# Altium PCB Battery_Operated Node.PcbDoc
Units mm, origin at the board's own origin, x right, y up, seen from the top; angles counter-clockwise.
Board outline 41.22 x 57.73 mm, 2 copper layers (Top, Bottom), stack 1.57 mm thick; 86 components, 66 nets, 272 pads, 54 vias.
Unrouted connection lines stored in the file: 2.
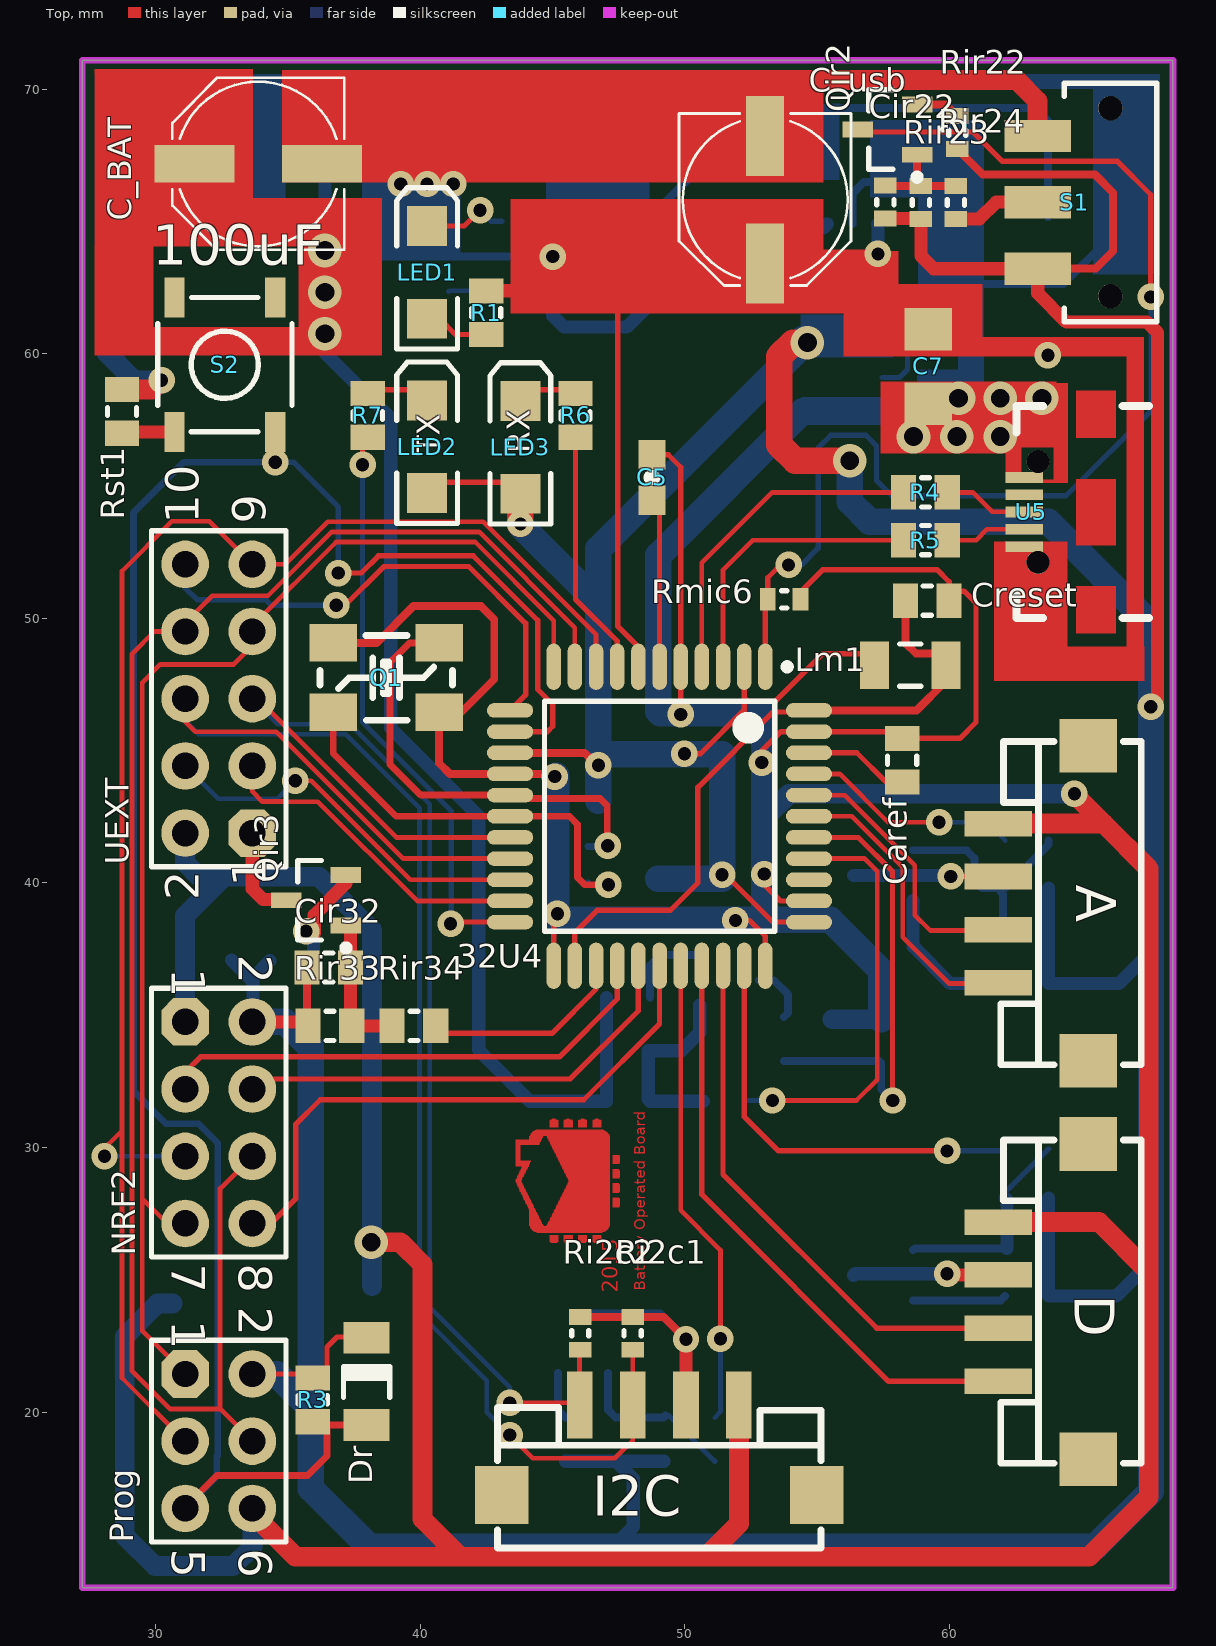
[diagram p0: Top view]
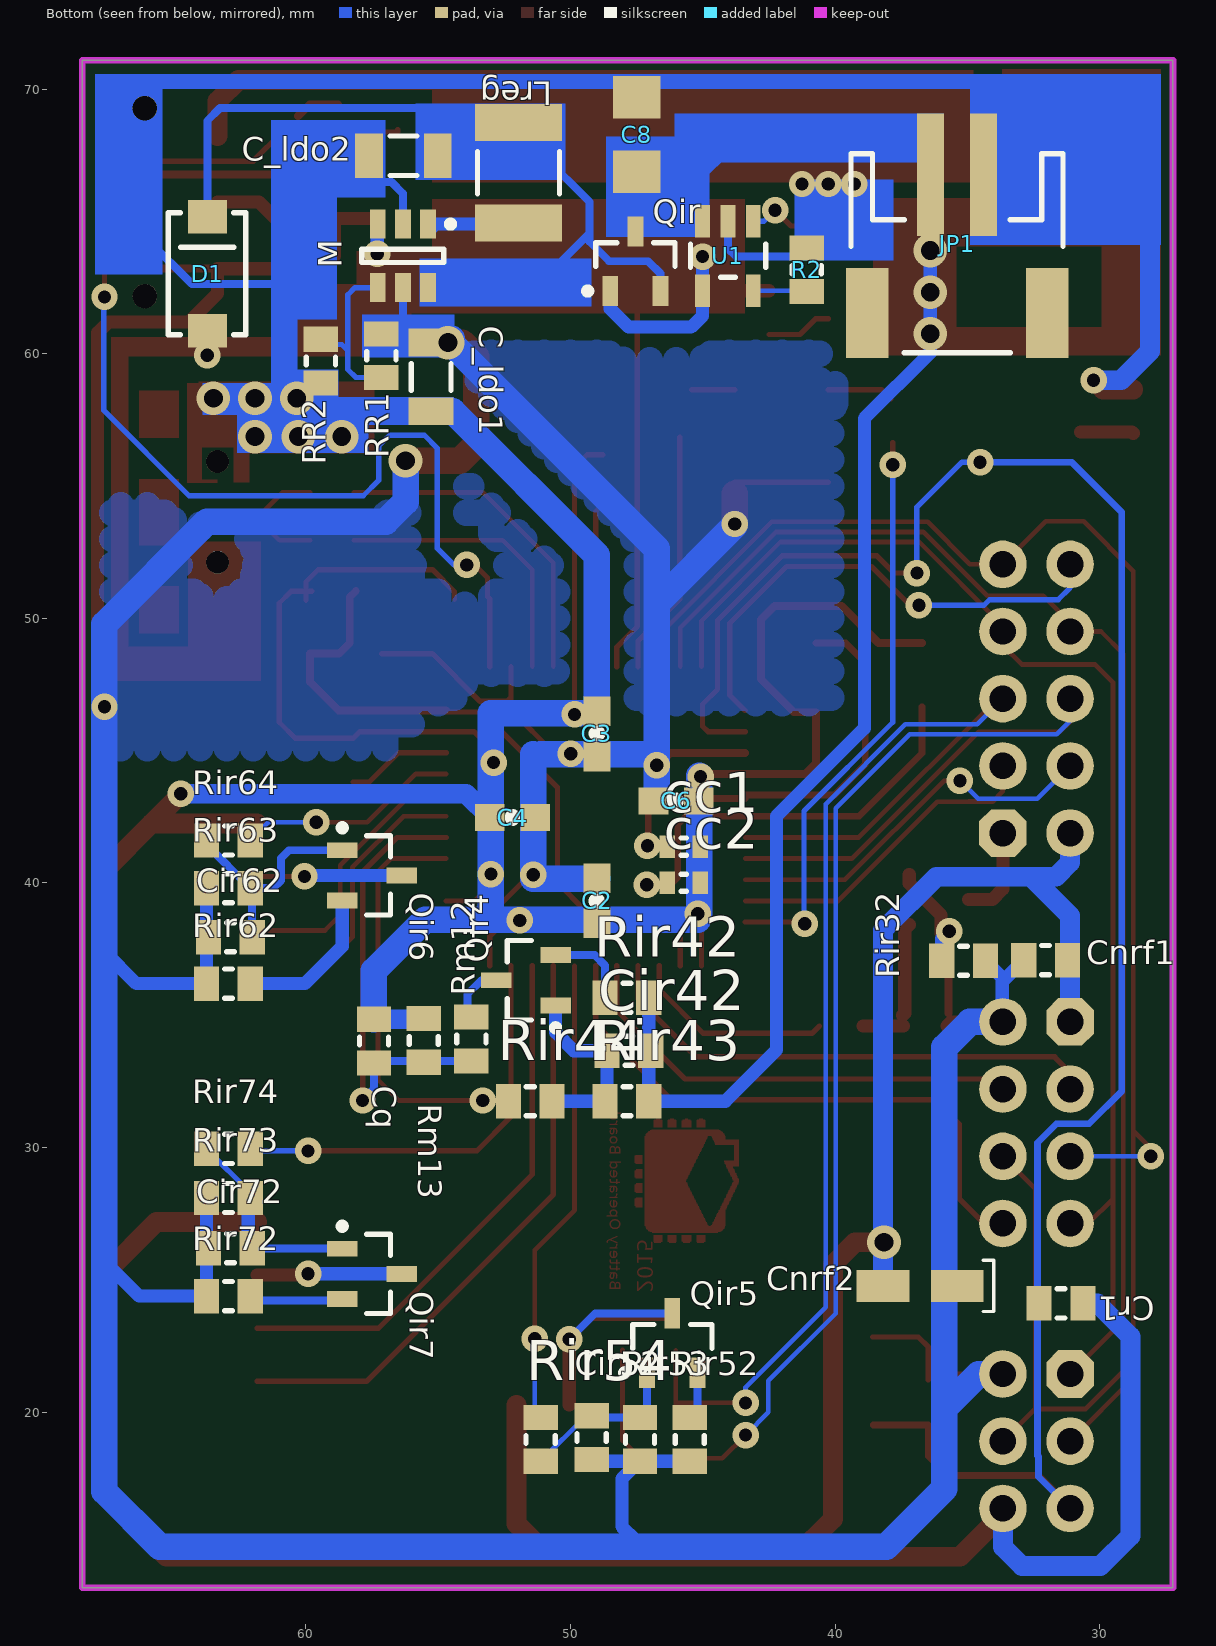
[diagram p1: Bottom view, seen from below]
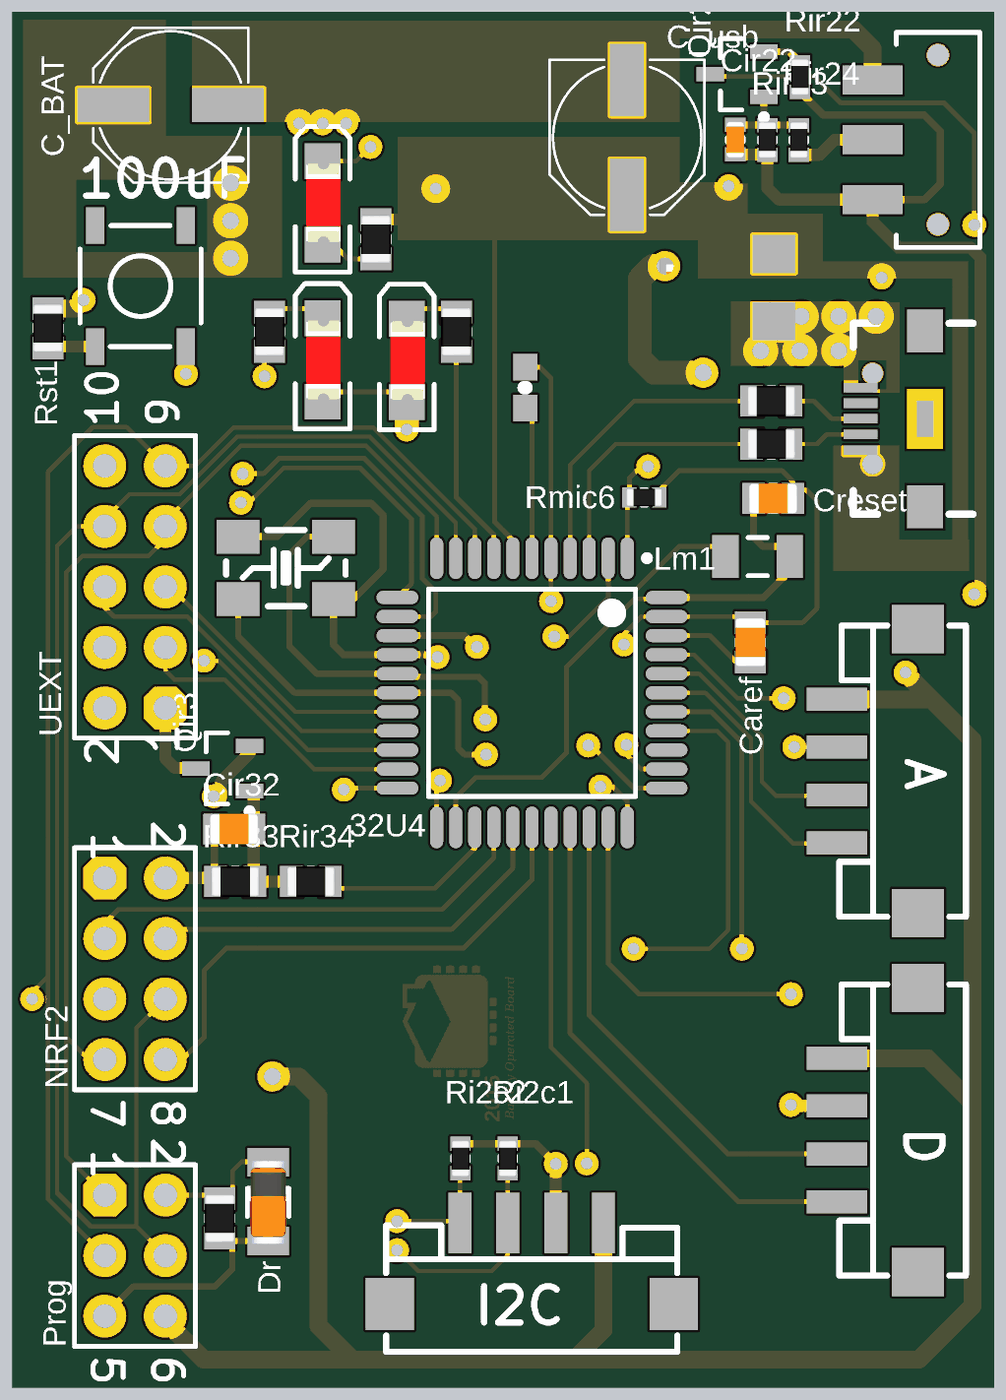
[diagram p2: 3D render of the assembled board from above, using the file's embedded part models]
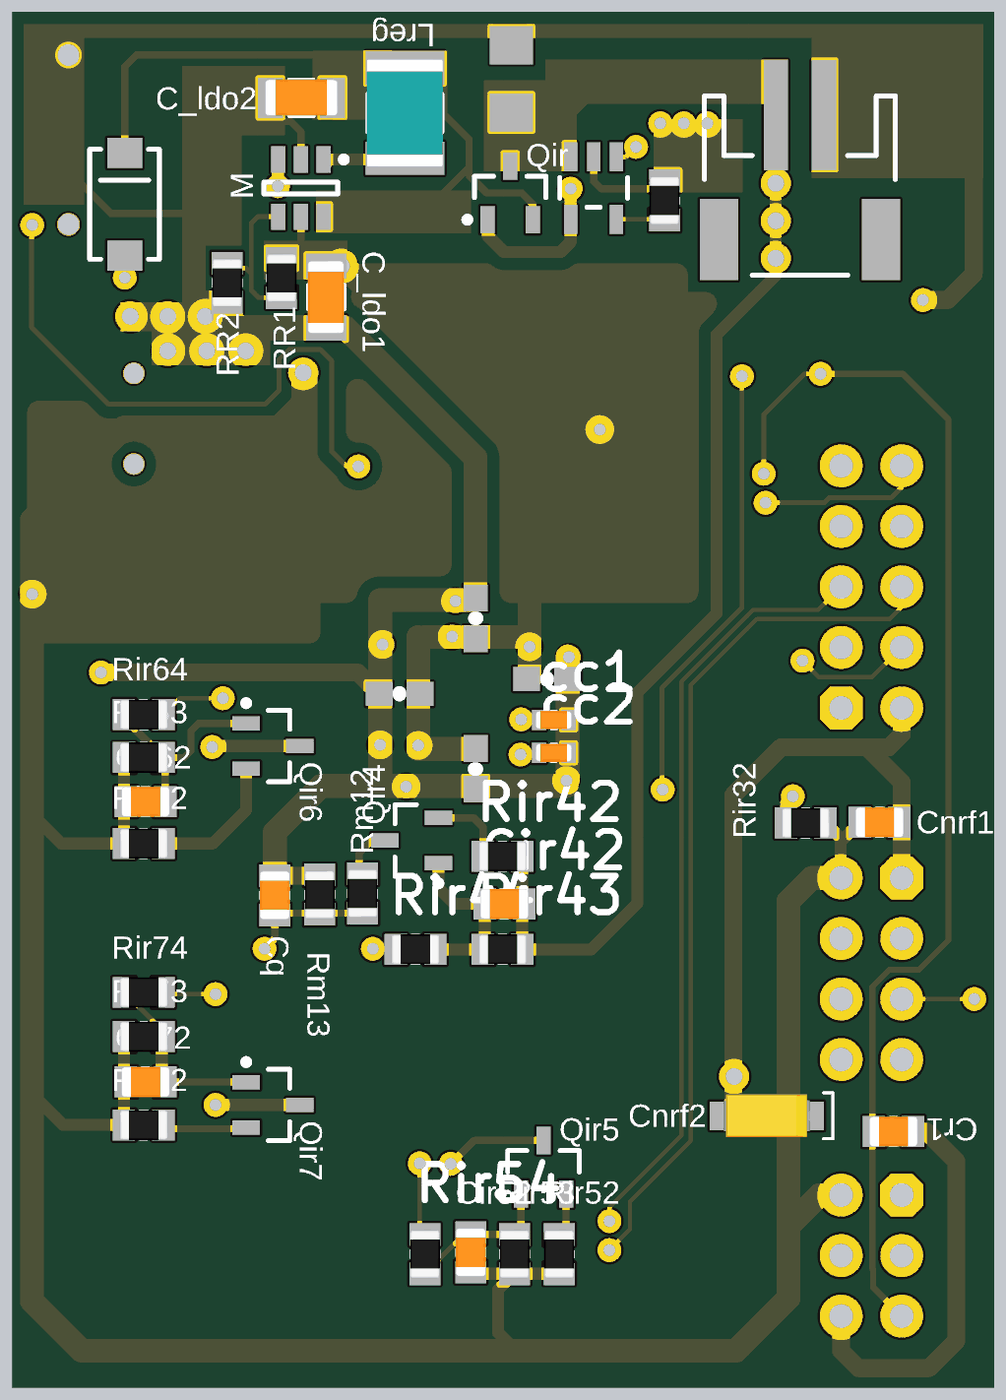
[diagram p3: 3D render of the assembled board from below, using the file's embedded part models]

## Layer stack, top to bottom
Top Solder: solder mask 0.0102, Solder Resist, Dk 3.5
Top: signal copper 0.035
Dielectric 1: core 1.5, FR-4, Dk 4.8
Bottom: signal copper 0.035
Bottom Solder: solder mask 0.0102, Solder Resist, Dk 3.5

## Board outline
27.229,13.36 27.229,71.095 68.453,71.095 68.453,13.36

## Design rules (kind name [scope] priority, off if disabled: settings)
Clearance POLY [InPolygon] p1: gap=0.5
Clearance mdViaVia [IsVia vs IsVia] p2: gap=0.203
Clearance mdPadVia [IsPad vs IsVia] p3: gap=0.203
Clearance mdPadPad [IsPad vs IsPad] p4: gap=0.203
Clearance mdWireVia [(InLayerClass('Signal Layers') AND IsTrack) vs IsVia] p5: gap=0.203
Clearance mdWirePad [(InLayerClass('Signal Layers') AND IsTrack) vs IsPad] p6: gap=0.203
Clearance mdWireWire [(InLayerClass('Signal Layers') AND IsTrack) vs (InLayerClass('Signal Layers') AND IsTrack)] p7: gap=0.203
Clearance [All] p8: gap=0.2
HoleSize [All] p1: absolutevalues=TRUE maxlimit=2540 minlimit=0.381 maxpercent=80.000 minpercent=20.000
HoleToHoleClearance [All] p1: gap=0.203 allowstackedmicrovias=TRUE
PolygonConnect ThermalVias [IsVia] p1: connectstyle=Direct reliefconductorwidth=0.254 reliefentries=4 polygonreliefangle="90 Angle" airgapwidth=0.254
PolygonConnect [All] p2: connectstyle=Relief reliefconductorwidth=0.254 reliefentries=4 polygonreliefangle="90 Angle" airgapwidth=0.254
RoutingVias [All] p1: holewidth=0.5 width=1 viastyle="Through Hole" minholewidth=0.5 minwidth=1 maxholewidth=0.711 maxwidth=1.27
SilkToSilkClearance [All] p1 off: silktosilkclearance=0.254
SilkToSolderMaskClearance [IsPad] p1 off: minsilkscreentomaskgap=0.254 clearancetoexposedcopper=TRUE
SolderMaskExpansion [All] p1: expansion=0.102
Width [All] p1: maxlimit=2540 minlimit=0.178 preferedwidth=0.254
26 further rules are at their usual default settings.

## Components (designator, comment, footprint, x,y, rotation, side; value= is the part's Value field where it differs from the comment)
32U4 "ATmega32U4-AU" 44ML_N 49.047,42.52 r270 top
A "TWIG-4P-2.0-SMD" 4P-SMD-2.0 61.849,39.243 r270 top
C2 ".1uF" 0603-CAP 48.997,39.319 r90 bottom
C3 ".1uF" 0603-CAP 49.004,45.644 r270 bottom
C4 ".1uF" 0603-CAP 52.197,42.469 r180 bottom
C5 "1uF" 0603-CAP 48.768,55.322 r90 top
C6 "4.7uF" 0603-CAP 45.999,43.104 r0 bottom
C7 "4.7uF" 1206 59.207,59.512 r90 top
C8 "4.7uF" 1206 47.498,68.301 r270 bottom
C_BAT "100uF" PANASONIC_D 33.884,67.183 r180 top
C_ldo1 "4.7uF" SMD_CAP_1206 55.27,60.427 r270 bottom
C_ldo2 "4.7uF" SMD_CAP_1206 55.016,67.488 r0 bottom
C_usb "100uF" PANASONIC_D 53.035,65.837 r270 top
Caref "100nF" SMD_CAP_0805 58.217,45.466 r270 top
cc1 "20pF" SMD_CAP_0603 45.72,41.377 r0 bottom
cc2 "20pF" SMD_CAP_0603 45.72,40.005 r0 bottom
Cir22 "1uF 10V" SMD_CAP_0603 57.582,65.735 r90 top
Cir32 "1uF 10V" SMD_CAP_0805 35.716,36.805 r0 top
Cir42 "1uF 10V" SMD_CAP_0805 46.968,33.657 r0 bottom
Cir52 "1uF 10V" SMD_CAP_0805 49.202,18.21 r90 bottom
Cir62 "1uF 10V" SMD_CAP_0805 63.682,37.95 r180 bottom
Cir72 "1uF 10V" SMD_CAP_0805 63.682,26.187 r180 bottom
Cnrf1 "100nF" SMD_CAP_0805 32.868,37.084 r180 bottom
Cnrf2 "4.7uF" "CAPP 1206 (3216X18L) Size A" 35.382,24.765 r0 bottom
Cq "100nF" SMD_CAP_0805 57.429,33.198 r90 bottom
Cr1 "4.7nF" SMD_CAP_0805 32.283,24.105 r180 bottom
Creset "10nF" SMD_CAP_0805 59.995,50.673 r180 top
D "TWIG-4P-2.0-SMD" 4P-SMD-2.0 61.849,24.181 r270 top
D1 "B340A" SMA-DIODE 63.729,63.017 r90 bottom
Dr "1N4148" LL4148 37.973,21.158 r90 top
I2C "TWIG-4P-2.0-SMD" 4P-SMD-2.0 49.047,20.269 r180 top
JP1 "JST-2" JST-2-SMD 35.382,63.068 r0 bottom
LED1 "RED" "LED SMD 1206" 40.259,63.081 r90 top
LED2 "RED" "LED SMD 1206" 40.259,56.49 r90 top
LED3 "RED" "LED SMD 1206" 43.79,56.464 r90 top
Lm1 "Inductor" INDC3216 58.522,48.235 r180 top
Lreg "Inductor(SD3114)" INDC4532 51.968,66.853 r270 bottom
M "mcp1640" MCP1640 56.337,63.703 r270 bottom
NRF2 "Header 4X2" HDR2X4 31.115,34.747 r270 top
Prog "Header 3X2" HDR2X3 31.115,21.438 r270 top
Q1 "16.000MHz/SMD5x3.2/12pF" CRYSTAL_SMD 38.71,47.752 r0 top
Qir "IRLML6401" Micro3_N 47.549,63.5 r90 bottom
Qir2 "IRLML6401" Micro3_N 57.658,68.478 r180 top (schematic designator Qir)
Qir3 "IRLML6401" Micro3_N 36.068,39.345 r180 top (schematic designator Qir)
Qir4 "IRLML6401" Micro3_N 51.689,36.322 r0 bottom (schematic designator Qir)
Qir5 "IRLML6401" Micro3_N 46.152,22.606 r90 bottom (schematic designator Qir)
Qir6 "IRLML6401" Micro3_N 57.506,40.284 r180 bottom (schematic designator Qir)
Qir7 "IRLML6401" Micro3_N 57.506,25.222 r180 bottom (schematic designator Qir)
R1 "330" "RES 0805 (2012X06L)" 42.494,62.381 r270 top
R2 "10k" "RES 0805 (2012X06L)" 41.072,62.357 r90 bottom
R3 "4.7k" "RES 0805 (2012X06L)" 35.941,19.634 r90 top
R4 "22" "RES 0805 (2012X06L)" 59.922,54.762 r180 top
R5 "22" "RES 0805 (2012X06L)" 59.922,52.959 r180 top
R6 "330" "RES 0805 (2012X06L)" 45.872,58.496 r270 top
R7 "330" "RES 0805 (2012X06L)" 38.024,58.496 r270 top
Ri2c1 "4.7K" "RES 0603 (1608X06L)" 48.031,22.352 r90 top
Ri2c2 "4.7K" "RES 0603 (1608X06L)" 46.05,22.352 r90 top
Rir22 "0" "RES 0603 (1608X06L)" 60.3,68.986 r270 top
Rir23 "100K" "RES 0603 (1608X06L)" 58.928,66.345 r270 top
Rir24 "10K" "RES 0603 (1608X06L)" 60.249,65.1 r90 top
Rir32 "0" "RES 0805 (2012X06L)" 35.966,37.059 r180 bottom
Rir33 "100K" "RES 0805 (2012X06L)" 37.414,34.595 r180 top
Rir34 "10K" "RES 0805 (2012X06L)" 40.589,34.595 r180 top
Rir42 "0" "RES 0805 (2012X06L)" 48.692,35.662 r180 bottom
Rir43 "100K" "RES 0805 (2012X06L)" 48.692,31.75 r180 bottom
Rir44 "10K" "RES 0805 (2012X06L)" 52.349,31.75 r180 bottom
Rir52 "0" "RES 0805 (2012X06L)" 45.491,19.787 r270 bottom
Rir53 "100K" "RES 0805 (2012X06L)" 47.371,19.787 r270 bottom
Rir54 "10K" "RES 0805 (2012X06L)" 51.13,19.787 r270 bottom
Rir62 "0" "RES 0805 (2012X06L)" 62.106,36.195 r0 bottom
Rir63 "100K" "RES 0805 (2012X06L)" 62.106,39.802 r0 bottom
Rir64 "10K" "RES 0805 (2012X06L)" 62.106,41.605 r0 bottom
Rir72 "0" "RES 0805 (2012X06L)" 62.106,24.382 r0 bottom
Rir73 "100K" "RES 0805 (2012X06L)" 62.106,28.09 r0 bottom
Rir74 "10K" "RES 0805 (2012X06L)" 62.106,29.944 r0 bottom
Rm12 "1M" "RES 0805 (2012X06L)" 53.746,34.925 r270 bottom
Rm13 "470K" "RES 0805 (2012X06L)" 55.55,33.223 r90 bottom
Rmic6 "4.7K" "RES 0603 (1608X06L)" 53.137,50.721 r0 top
RR1 "976" "RES 0805 (2012X06L)" 57.15,59.106 r90 bottom
RR2 "562" "RES 0805 (2012X06L)" 59.436,58.903 r90 bottom
Rst1 "330" "RES 0805 (2012X06L)" 28.727,58.649 r270 top
S1 "" SWITCH-SPDT-SMD 66.091,65.735 r270 top
S2 "!RESET" TACTILE_SWITCH_SMD 32.614,59.588 r90 top
U1 "MCP73831" SOT23-5 44.044,63.71 r0 bottom
U5 "USB-ABCONN-11794" USB-AB-MICRO-SMD_V03 65.557,54.026 r180 top
UEXT "Header 5X2" HDR2X5 33.655,41.885 r90 top

## Footprints (in the part's own frame and the unit in brackets; to place one, negate y for a bottom-side part, rotate by r counter-clockwise, add the part's x,y. Pads: shape width x height; smd on the part's side, far side on the other; paste and mask are expansions set on the pad)
4P-SMD-2.0 [mil]
  rect 38x100 smd: 1(-118.11,0) 2(-39.37,0) 3(40,0) 4(119,0)
  rect 80x86 smd: SS1(-234.09,134) SS2(235,134)
  silkscreen extent -240,4 241,213
44ML_N [mm] "Thin QFP, 44-Leads, Body 10x10mm, Pitch 0.8mm, IPC Medium Density"
  oval 1.75x0.55 smd: 1(-5.65,4) 2(-5.65,3.2) 3(-5.65,2.4) 4(-5.65,1.6) 5(-5.65,0.8) 6(-5.65,0) 7(-5.65,-0.8) 8(-5.65,-1.6) 9(-5.65,-2.4) 10(-5.65,-3.2) 11(-5.65,-4) 23(5.65,-4) 24(5.65,-3.2) 25(5.65,-2.4) 26(5.65,-1.6) 27(5.65,-0.8) 28(5.65,0) 29(5.65,0.8) 30(5.65,1.6) 31(5.65,2.4) 32(5.65,3.2) 33(5.65,4)
  oval 0.55x1.75 smd: 12(-4,-5.65) 13(-3.2,-5.65) 14(-2.4,-5.65) 15(-1.6,-5.65) 16(-0.8,-5.65) 17(0,-5.65) 18(0.8,-5.65) 19(1.6,-5.65) 20(2.4,-5.65) 21(3.2,-5.65) 22(4,-5.65) 34(4,5.65) 35(3.2,5.65) 36(2.4,5.65) 37(1.6,5.65) 38(0.8,5.65) 39(0,5.65) 40(-0.8,5.65) 41(-1.6,5.65) 42(-2.4,5.65) 43(-3.2,5.65) 44(-4,5.65)
  silkscreen extent -5.77,-4.35 4.35,4.95, body extent -5,-5 5,5, height 1.2
0603-CAP [mil] "0603-CAP"
  rect 44x40 smd: 1(-33.46,0) 2(34,0)
  silkscreen extent 0,-1 0,2
1206 [mil] "1206"
  rect 63x71 smd: 1(-55.12,0) 2(56,0)
"CAPP 1206 (3216X18L) Size A" [mm] "Chip Capacitor, 2-Leads, Body 3.2x1.6mm, IPC High Density, chip Tantalum"
  rect 1.999x1.199 smd: 1(0,0) 2(2.8,0)
  silkscreen extent -1.38,-0.97 -0.99,0.97, body extent -0.43,-0.9 3.21,0.9, height 1.8
CRYSTAL_SMD [mil] "CRYSTAL_SMD"
  rect 71x56 smd: 1(-78.74,-51.18) 2(79,52) NC_1(79,-51.18) NC_2(-78.74,52)
  silkscreen extent -98,-63 99,63
HDR2X3 [mm]
  oct 1.8x1.8 hole 1: 1(0,0)
  round 1.8 hole 1: 2(0,2.54) 3(2.54,0) 4(2.54,2.54) 5(5.08,0) 6(5.08,2.54)
  silkscreen extent -1.27,-1.27 6.35,3.81
HDR2X4 [mm]
  oct 1.8x1.8 hole 1: 1(0,0)
  round 1.8 hole 1: 2(0,2.54) 3(2.54,0) 4(2.54,2.54) 5(5.08,0) 6(5.08,2.54) 7(7.62,0) 8(7.62,2.54)
  silkscreen extent -1.27,-1.27 8.89,3.81
HDR2X5 [mm]
  oct 1.8x1.8 hole 1: 1(0,0)
  round 1.8 hole 1: 2(0,2.54) 3(2.54,0) 4(2.54,2.54) 5(5.08,0) 6(5.08,2.54) 7(7.62,0) 8(7.62,2.54) 9(10.16,0) 10(10.16,2.54)
  silkscreen extent -1.27,-1.27 11.43,3.81
INDC3216 [mm] "Chip Inductor, Body 3.2x1.6mm, IPC High Density"
  rect 1.1x1.8 smd: 1(-1.35,0) 2(1.35,0)
  silkscreen extent -0.4,-0.8 0.4,0.8
INDC4532 [mm] "Chip Inductor, Body 4.5x3.2mm, IPC High Density"
  rect 1.4x3.3 smd: 1(-1.9,0) 2(1.9,0)
  silkscreen extent -0.8,-1.55 0.8,1.55, body extent -2.25,-1.6 2.25,1.6, height 1.75
JST-2-SMD [mil] "JST-2-SMD"
  rect 40x182 smd: 1(-39.37,-145.67) 2(40,-145.67)
  rect 63x134 smd: NC1(-133.86,60) NC2(134,60)
  silkscreen extent -157,-177 158,119
"LED SMD 1206" [mm]
  rect 1.5x1.5 smd: 1(-1.75,0) 2(1.75,0)
  silkscreen extent -2.9,-1.15 3.2,1.15, body extent -1.65,-0.76 1.65,0.69, height 1.36
LL4148 [mm] "MELF Diode, 2-Leads, Body 3.5x1.4mm, IPC Medium Density"
  rect 1.2x1.75 smd: 1(-1.65,0) 2(1.65,0)
  silkscreen extent -0.61,-0.88 0.57,0.88, body extent -1.78,-0.75 1.72,0.75, height 1.55
MCP1640 [mm] "SOT23, 6-Leads, Body 2.90x2.70mm, Pitch 0.95mm, IPC Medium Density"
  rect 1.1x0.6 smd: 1(-1.2,0.95) 2(-1.2,0) 3(-1.2,-0.95) 4(1.2,-0.95) 5(1.2,0) 6(1.2,0.95)
  silkscreen extent -1.32,-1.55 0.25,1.92, body extent -0.9,-1.55 0.9,1.55, height 0.9
Micro3_N [mm] "SOT23, 3-Leads, Body 2.9x1.3mm, Pitch 0.95mm, Lead Span 2.3mm, IPC Medium Density"
  rect 1.15x0.6 smd: 1(-1.125,0.95) 2(-1.125,-0.95) 3(1.125,0)
  silkscreen extent -1.25,-1.5 0.7,1.93, body extent -0.7,-1.5 0.7,1.5, height 1.12
PANASONIC_D [mil]
  rect 119x56 smd: +(95,0) -(-94.49,0)
  silkscreen extent -128,-128 128,128
"RES 0603 (1608X06L)" [mm] "Chip Resistor, 2-Leads, Body 1.6x0.8mm, IPC High Density _ (0.063W)"
  rect 0.6x0.85 smd: 1(0,0) 2(1.244,0)
  silkscreen extent 0.52,-0.33 0.72,0.33, body extent -0.14,-0.38 1.38,0.38, height 0.45
"RES 0805 (2012X06L)" [mm] "Chip Resistor, 2-Leads, Body 2.0x1.3mm, IPC High Density _ (0.100 W)"
  rect 0.95x1.3 smd: 1(0,0) 2(1.65,0)
  silkscreen extent 0.67,-0.55 0.97,0.55, body extent -0.19,-0.63 1.84,0.64, height 0.6
SMA-DIODE [mil] "SMA-DIODE"
  rect 50x58 smd: A(-84.65,0) C(85,0)
  silkscreen extent -91,-57 91,58
SMD_CAP_0603 [mm]
  rect 0.6x0.85 smd: 1(-0.622,0) 2(0.622,0)
  silkscreen extent -0.1,-0.33 0.1,0.33, body extent -0.76,-0.38 0.76,0.38, height 0.6
SMD_CAP_0805 [mm]
  rect 0.95x1.3 smd: 1(0,0) 2(1.65,0)
  silkscreen extent 0.67,-0.55 0.97,0.55, body extent -0.19,-0.63 1.84,0.63, height 0.65
SMD_CAP_1206 [mm]
  rect 1.05x1.7 smd: 1(0,0) 2(2.596,0)
  silkscreen extent 0.8,-0.75 1.8,0.75, body extent -0.22,-0.77 2.82,0.75, height 0.75
SOT23-5 [mil] "SOT23-5"
  rect 22x48 smd: 1(-37.4,-51.18) 2(0,-51.18) 3(38,-51.18) 4(38,52) 5(-37.4,52)
  silkscreen extent -56,-17 56,32
SWITCH-SPDT-SMD [mil]
  round 36 hole 36: 1(-139.76,0) 1(140,0)
  rect 48x99 smd: 1(-98.43,-108.27) 2(0,-108.27) 3(99,-108.27)
  silkscreen extent -177,-69 178,69
TACTILE_SWITCH_SMD [mil] "TACTILE_SWITCH_SMD"
  rect 60x30 smd: 1(-100,75) 2(100,75) 3(-100,-75) 4(100,-75)
  silkscreen extent -100,-100 100,100
USB-AB-MICRO-SMD_V03 [mil] "USB-AB-MICRO-SMD_V03"
  round 34 hole 34: 1(87,75) 1(87,-74.8)
  rect 56x16 smd: D+1(107,0) D-1(107,26) GND1(107,-51.18) ID1(107,-25.59) VBUS1(107,52)
  Top region: -29.53,110 30,110 30,181 -29.53,181
  Top region: -29.49,-49.21 30.04,-49.21 30.04,50 -29.49,50
  Top region: -29.53,-180.47 30,-180.47 30,-109.61 -29.53,-109.61
  silkscreen extent -79,-157 119,158

## Part data
32U4: "8-bit AVR Microcontroller, 2.7-5.5V, 32KB Flash, 2.5KB EEPROM, 1KB SRAM, USB Controller, 44-pin TQFP, Industrial Grade (-40°C to 85°C)"
A D I2C: library part TWIG-4P-2.0-SMD-FEMALE-REINFORCE'DD'
C2 C3 C4 C5 C6: library part CAP0603-CAP, "ceramic capacitor"
C7 C8: library part CAP1206, "ceramic capacitor"
C_BAT C_usb: library part CAP_POLD, "Polar Capacitor 6.3V"
C_ldo1 C_ldo2 Caref cc1 cc2 Cir22 Cir32 Cir42 Cir52 Cir62 Cir72 Cnrf1 Cq Cr1 Creset: library part Cap-Bipolar, "ceramic capacitor"
Cnrf2: library part Cap-Polar, "Polar Capacitor"
D1: library part DIODE-SCHOTTKY-B340A, "Schottky diodes in SFE's production catalog<p> /  / BAT20J 1A 23V 0.62Vf<br> / RB751 120mA 40V 0.37Vf<br> / PMEG4005EJ 0.5A 40V 0.42Vf<br> / MBRA140 1A 40V 0.5Vf<br> / B340A  3A 40V SMA <br>"
Dr: library part "Diode 1N4148", "High Conductance Fast Diode"
JP1: library part M02-JST-2MM-SMT, "Standard 2-pin 0.1\" header. Use with <br> / - straight break away headers ( PRT-00116)<br> / - right angle break away headers (PRT-00553)<br> / - swiss pins (PRT-00743)<br> / - machine pins (PRT-00117)<br> / - female headers (PRT-00115)<br><br> /  /  Molex polarized connector foot print use with: PRT-08233 with associated crimp pins and housings.<br><br> /  / 2.54_SCREWTERM for use with  PRT-10571.<br><br> /  / 3.5mm Screw Terminal footprints for  PRT-08084<br><br> /  / 5mm Screw Terminal footprints for use with PRT-08433"
LED1 LED2 LED3: library part LED, "LED"
Lreg: library part Inductor, "Inductor SD3114"
M: "MCP1640DT-I/CHY , 0.65V, Sync Reg., 6LD SOT-23 pkg"
NRF2: "Header, 4-Pin, Dual row"
Prog: "Header, 3-Pin, Dual row"
Q1: library part SMALL_SMD_CRYSTAL
Qir Qir2 Qir3 Qir4 Qir5 Qir6 Qir7: "HEXFET Power MOSFET"
R1 R2 R3 R4 R5 R6 R7 Ri2c1 Ri2c2 Rir22 Rir23 Rir24 Rir32 Rir33 Rir34 Rir42 Rir43 Rir44 Rir52 Rir53 Rir54 Rir62 Rir63 Rir64 Rir72 Rir73 Rir74 Rm12 Rm13 Rmic6 RR1 RR2 Rst1: library part Resistor, "Resistor"
S1: library part SWITCH-SPDTSMD2
S2: library part SWITCH-MOMENTARY-2SMD, "Various NO switches- pushbuttons, reed, etc"
U1: "Miniature single cell, fully integrated Li-Ion, Li-polymer charge management controller<br> / http://ww1.microchip.com/downloads/en/DeviceDoc/21984a.pdf<br> / IC-09995"
U5: "This is a USB AB connector that is compatible with USB OTG. i.e. this connector can serve as a host or device"
UEXT: "Header, 5-Pin, Dual row"

## Via types
v1: diameter 1, hole 0.5, Top to Bottom, 42 vias
v2: diameter 1.27, hole 0.711, Top to Bottom, 12 vias

## Nets (pads, with @x,y where several pads share a name; then routed paths per layer and width w, separated by ;. In a path a pad name is that pad's centre, name@x,y a point inside that pad or via, vN(x,y) a via of type N, cw(c..) or ccw(c..) an arc to the next point about the centre after c; other vN are vias at no path point)
3.3V: 32U4.2 32U4.14 32U4.34 C2.2 C3.2 C4.2 C6.2 C_ldo1.1 Cir22.1 Cir32.1 Cir52.1 Cir62.1 Cir72.1 Cnrf1.1 Cnrf2.1 Dr.2 LED2.1 LED3.1 Lm1.2 M.5 NRF2.2 Prog.2 R3.2 Rir22.2 Rir23.2 Rir32.2 Rir33.2 Rir52.2 Rir53.2 Rir62.2 Rir63.2 Rir72.2 Rir73.2 RR1.2 S1.3 | length 253.2
  Top w0.2: Prog.2 36.258,21.438 36.474,21.221 36.474,22.454 36.854,22.834 Dr.2@38.583,22.834 ; LED2.1@40.259,55.146 LED3.1@43.79,55.146 ; v1(49.987,44.882) 50.597,44.882 52.247,46.532 52.247,47.016 ; v1(51.41,40.31) 51.537,40.31 53.327,38.52 32U4.34 ; 32U4.2 52.247,47.016 ; Lm1.2@57.146,48.666 55.22,48.666 53.416,46.863 52.4,46.863 52.247,47.016
  Top w0.3: Rir33.2@35.716,35.075 Cir32.1 ; 32U4.14 46.216,44.92 46.736,44.399 v1(46.736,44.45) ; Rir22.2 61.265,66.777 65.507,66.777 66.192,66.091 66.192,63.881 65.532,63.221 S1.3
  Top w0.5: NRF2.2 35.612,34.747 Rir33.2 ; Cir22.1 Rir23.2@58.915,65.113 ; Rir23.2 58.928,63.703 59.411,63.221 S1.3 63.341,62.288 64.428,61.201 67.476,61.201 67.876,60.8 67.876,46.921 v1(67.615,46.66)
  Top w1: v1(43.79,53.569) LED3.1 ; v2(54.635,60.427) 54.102,60.427 53.569,59.893 53.569,56.566 54.178,55.956 v2(56.236,55.956)
  Bottom w0.3: M.5 56.337,60.935 56.629,60.642 56.922,60.35 RR1.2@57.455,60.35
  Bottom w0.5: Cnrf1.1 33.68,36.271 ; NRF2.2 33.68,34.773 33.68,36.271 ; Rir32.2 33.68,36.423 33.68,36.271 ; Rir52.2 Rir53.2@47.396,18.137 ; 47.561,15.176 48.057,15.672 48.057,17.476 Rir53.2@47.396,18.137 ; Cir52.1@49.203,18.137 Rir53.2@47.396,18.137 ; C_ldo1.1 55.347,60.35 RR1.2@56.922,60.35 ; Rir73.2 Rir72.2 66.303,24.382 67.626,25.705 ; Rir63.2 Rir62.2 66.407,36.195 67.626,37.414
  Bottom w1: Prog.2 34.569,21.438 35.839,20.168 ; NRF2.2 34.9,34.747 35.865,33.782 35.865,17.103 38.058,14.91 65.532,14.91 67.626,17.004 67.626,25.705 67.626,37.414 67.626,49.773 63.741,53.657 56.985,53.657 56.236,54.407 v2(56.236,55.956) ; v1(43.79,53.569) 43.815,53.543 43.815,53.492 46.736,50.571 ; C6.2@46.736,43.104 v1(46.736,44.45) v1@46.736,44.856 ; C2.2@48.997,40.157 51.41,40.157 v1(51.41,40.31) 51.41,44.856 ; 51.13,44.856 v1@46.736,44.856 ; C_ldo1.1@54.483,60.579 54.483,60.376 46.736,52.629 46.736,50.571 ; v2(54.635,60.427) C_ldo1.1 ; C_ldo1.1@55.27,60.642 RR1.2@56.629,60.642 ; v1@46.736,44.856 46.736,50.571
5V: 32U4.7 C7.2 C_usb.+ D1.A M.3 Qir.1 R1.1 U1.4 U5.VBUS1 | length 50
  Top w0.2: 45.745,63.703 47.473,61.976 47.473,49.69 48.247,48.915 32U4.7
  Top w0.5: R1.1 44.093,62.381 44.171,62.459 ; v1(45.009,63.678) 45.009,63.703 45.745,63.703 v1@57.302,63.703 ; C7.2@58.318,60.554 58.725,60.147 66.904,60.147 67.081,59.969 ; 64.186,47.904 66.523,47.904 ; 66.954,59.512 67.005,59.461
  Bottom w0.5: v1(45.009,63.678) U1.4 45.009,61.443 45.441,61.011 47.803,61.011 48.499,61.707 Qir.1 ; M.3 57.302,64.888 v1(57.302,63.779)
  other v1: 63.729,59.944
A0: 32U4.36
A1: 32U4.37 Rir44.1 | length 15.9
  Top w0.178: v1(53.315,31.775) 56.49,31.775 57.277,32.563 57.277,40.445 56.803,40.92 32U4.37
  Bottom w0.178: Rir44.1@52.375,31.775 v1(53.315,31.775)
A2: 32U4.38 Cq.1 Rm12.2 Rm13.1 | length 17.5
  Top w0.2: 32U4.38 56.557,41.72 57.85,40.427 v1@57.85,31.775
  Bottom w0.3: Rm12.2 Cq.1@57.352,33.275 ; Cq.1 57.429,32.207 v1(57.861,31.775)
A3: 32U4.39 A.4 | length 11.3
  Top w0.178: 32U4.39 56.312,42.52 58.242,40.589 58.242,37.948 59.995,36.195 A.4@61.824,36.195
A4: 32U4.40 A.3 | length 10.4
  Top w0.178: 32U4.40 56.051,43.32 58.699,40.671 58.699,38.786 59.284,38.202 A.3@61.824,38.202
A5: 32U4.41 Rir64.1 | length 8.4
  Top w0.178: 32U4.41 55.855,44.12 57.683,42.291 v1(59.614,42.291)
  Bottom w0.178: v1(59.614,42.291) 61.42,42.291 Rir64.1
CE1NRF: 32U4.26 NRF2.3 | length 19.4
  Top w0.2: NRF2.3 31.115,32.842 31.699,33.426 45.263,33.426 47.447,35.611 32U4.26
CSN1NRF: 32U4.27 NRF2.4 | length 17.5
  Top w0.2: NRF2.4 34.036,32.588 45.669,32.588 48.247,35.166 32U4.27
D0: 32U4.20 UEXT.4 | length 14.6
  Top w0.178: v1(35.281,43.866) 35.879,43.866 39.626,40.12 32U4.20
  Bottom w0.178: UEXT.4 32.36,43.18 34.595,43.18 v1(35.281,43.866)
D1: 32U4.21 UEXT.3 | length 12.4
  Top w0.178: UEXT.3 33.655,43.459 34.038,43.077 34.95,43.077 34.953,43.074 36.133,43.074 39.887,39.32 32U4.21
D2: 32U4.19 I2C.3 Ri2c1.1 UEXT.6 | length 60.2
  Top w0.178: UEXT.6 31.115,46.101 31.496,45.72 34.564,45.72 39.364,40.92 32U4.19 ; v1(43.383,19.126) 44.259,18.25 47.358,18.25 48.031,18.923 I2C.3 Ri2c1.1
  Bottom w0.178: UEXT.6 31.115,46.126 31.623,45.618 37.18,45.618 39.975,42.824 39.975,23.724 42.52,21.179 42.52,19.99 v1(43.383,19.126)
D3: 32U4.18 I2C.4 Ri2c2.1 UEXT.5 | length 48.9
  Top w0.178: UEXT.5 33.858,46.965 39.103,41.72 32U4.18 ; v1(43.383,20.345) 45.949,20.345 I2C.4 Ri2c2.1@46.025,22.327
  Bottom w0.178: UEXT.5 34.62,45.999 37.338,45.999 40.356,42.982 40.356,23.957 43.383,20.93 v1(43.383,20.345)
D4: 32U4.25 Rir34.1 | length 7.8
  Top w0.2: Rir34.1 40.869,34.315 44.983,34.315 46.647,35.979 32U4.25
D5: 32U4.31 D.3 | length 20.7
  Top w0.2: 32U4.31 51.447,28.98 57.263,23.165 D.3
D7: 32U4.1 Qir2.3 Rmic6.1 | length 45.9
  Top w0.2: 32U4.1 53.047,50.734 53.137,50.823 53.137,51.537 53.772,52.172 v1(53.924,52.019) ; Qir2.3 56.533,68.383 60.897,68.383 61.996,67.285 66.345,67.285 67.615,66.015 v1(67.615,62.154)
  Bottom w0.2: v1(53.924,52.019) 54.407,52.019 55.042,52.654 55.042,56.439 55.524,56.921 56.845,56.921 57.252,56.515 57.252,55.22 57.836,54.635 64.414,54.635 67.64,57.861 67.64,62.179 v1(67.615,62.154)
D8: 32U4.28 NRF2.8 | length 22.4
  Top w0.2: NRF2.8 34.366,27.127 35.293,28.054 35.293,30.874 36.224,31.804 46.18,31.804 49.047,34.671 32U4.28
D9: 32U4.29 Rir54.1 | length 17.9
  Top w0.178: 32U4.29 49.847,27.623 51.348,26.122 v1(51.348,22.769)
  Bottom w0.178: Rir54.1 51.348,20.005 v1(51.348,22.769) v1@51.435,22.682
D10: 32U4.30 D.4 | length 22.8
  Top w0.2: 32U4.30 50.647,28.22 57.709,21.158 D.4
D11: 32U4.12 UEXT.10 | length 19.1
  Top w0.2: v1(36.83,50.495) 37.16,50.495 38.626,51.961 41.836,51.961 43.985,49.812 43.985,47.107 32U4.12
  Bottom w0.2: UEXT.10 31.115,51.156 31.563,50.708 34.153,50.708 34.366,50.495 v1(36.83,50.495)
D13: 32U4.32 Rir74.1 | length 16.3
  Top w0.2: 32U4.32 52.247,31.166 53.543,29.87 v1(59.919,29.87) v1@59.944,29.87
  Bottom w0.2: v1@59.787,29.87 v1(59.919,29.87) 62.032,29.87 Rir74.1
D14: 32U4.8 R6.2 | length 9.3
  Top w0.2: R6.2 45.872,50.72 47.447,49.145 32U4.8
D15: 32U4.9 NRF2.5 Prog.3 UEXT.9 | length 61.6
  Top w0.178: v1(28.067,29.667) 27.762,29.667 28.727,30.632 ; Prog.3 28.727,21.285 28.727,30.632 ; 32U4.9 46.647,49.39 42.388,53.65 36.505,53.65 34.9,52.045 UEXT.9 32.029,53.67 30.607,53.67 28.727,51.791 28.727,30.632
  Bottom w0.178: v1(28.067,29.667) NRF2.5
D16: 32U4.10 NRF2.6 Prog.4 UEXT.8 | length 64.6
  Top w0.178: Prog.4 32.436,20.117 ; NRF2.6 32.436,28.448 32.436,20.117 ; 32U4.10 45.847,49.651 42.23,53.269 36.662,53.269 34.246,50.852 32.133,50.852 31.115,49.835 UEXT.8 29.947,49.505 29.108,48.666 29.108,21.539 30.531,20.117 32.436,20.117
D17: 32U4.11 NRF2.7 Prog.1 UEXT.7 | length 50
  Top w0.178: Prog.1 29.489,23.063 29.489,28.067 ; NRF2.7 30.429,27.127 29.489,28.067 ; 32U4.11 45.047,49.912 42.072,52.888 36.82,52.888 33.655,49.722 UEXT.7 33.655,48.971 32.944,48.26 30.175,48.26 29.489,47.574 29.489,28.067
D+: 32U4.4 R4.2 | length 12.6
  Top w0.178: 32U4.4 50.647,52.095 53.314,54.762 R4.2@58.192,54.762
D-: 32U4.3 R5.2 | length 10.9
  Top w0.178: 32U4.3 51.447,51.841 52.565,52.959 R5.2@58.192,52.959
GND: 32U4.5 32U4.15 32U4.23 32U4.33 32U4.35 32U4.43 A.1 C2.1 C3.1 C4.1 C5.2 C6.1 C7.1 C8.1 C_BAT.- C_ldo1.2 C_ldo2.2 C_usb.- Caref.1 cc1.1 cc2.1 Cnrf1.2 Cnrf2.2 Cq.2 Cr1.2 Creset.1 D.1 I2C.1 JP1.1 M.2 NRF2.1 Prog.6 Q1.NC_1 Q1.NC_2 R2.2 Rm13.2 Rmic6.2 RR2.1 Rst1.1 S1.1 U1.2 U5.GND1 UEXT.2 | length 318.1
  Top w0.2: 32U4.23 45.047,38.976 v1(45.187,38.837) ; C5.2 49.377,56.186 49.847,55.715 32U4.5 v1(49.847,46.368) ; v1(51.918,38.583) 52.451,38.583 53.047,37.986 32U4.33 ; v1(52.908,44.548) 52.908,44.983 53.644,45.72 32U4.43 57.963,45.72 Caref.1 60.401,45.466 61.011,46.076 61.011,50.571 60.554,51.029 Creset.1@59.995,51.029 ; v1(53.01,40.335) 53.01,39.929 53.619,39.32 32U4.35 ; Rmic6.2 54.381,51.003 55.22,51.841 59.538,51.841 59.995,51.384 Creset.1@59.995,51.029 ; Creset.1@59.769,51.029 Creset.1@59.995,51.029 ; Creset.1 Creset.1@59.995,51.029
  Top w0.254: A.1 A.1@61.9,42.294
  Top w0.3: Q1.NC_2 38.354,49.073 39.751,50.47 42.291,50.47 42.799,49.962 42.799,47.701 41.55,46.452 Q1.NC_1 40.716,44.526 41.123,44.12 32U4.15 v1@44.882,44.12
  Top w0.75: Rst1.1 29.87,58.649 v1(30.226,59.004) ; Prog.6 33.655,16.154 35.281,14.529 41.504,14.529 ; v2(38.151,26.416) 39.243,26.416 40.081,25.578 40.081,15.951 41.504,14.529 ; I2C.1 52.047,15.776 50.8,14.529 ; 53.365,70.358 62.544,70.358 63.341,69.561 S1.1@63.341,68.235 ; D.1 65.656,27.181 67.539,25.298 ; A.1 65.834,42.243 ; v1(64.731,43.369) 64.719,43.358 65.834,42.243 ; 41.504,14.529 50.8,14.529 ; 50.8,14.529 65.278,14.529 67.539,16.789 67.539,25.298 ; 65.834,42.243 67.539,40.538 67.539,25.298
  Bottom w0.2: 60.07,64.438 60.122,64.386
  Bottom w0.3: JP1.1 34.382,69.592 ; R2.2@40.831,63.678 R2.2@41.161,64.007 ; R2.2 R2.2@41.161,64.007 ; U1.2 44.044,63.983 43.739,63.678 41.49,63.678 R2.2@41.161,64.007 ; C_ldo1.2 58.694,57.831 ; M.2 56.337,66.065 56.769,66.497 57.302,66.497 ; C_ldo2.2 59.512,67.488 60.935,66.065 60.935,62.636 ; RR2.1@59.258,59.106 59.258,58.395 58.694,57.831 ; 60.071,62.636 60.935,62.636 ; 65.989,68.072 65.989,64.313 64.313,62.636 60.935,62.636 ; 58.694,57.831 60.345,57.831 60.935,58.42 60.935,62.636
  Bottom w0.75: 28.092,65.049 28.092,60.096 29.185,59.004 v1(30.226,59.004) ; Cr1.2 30.074,24.105 28.829,22.86 28.829,15.316 29.972,14.173 32.928,14.173 33.655,14.901 Prog.6 ; NRF2.1 31.115,38.76 32.588,40.234 ; UEXT.2 31.115,40.767 31.648,40.234 32.588,40.234 ; Cnrf2.2 38.182,38.221 36.17,40.234 32.588,40.234 ; C4.1 53.947,43.369 v1(64.731,43.369) ; Rm13.2@55.575,34.848 Cq.2
  Bottom w1: v1@45.136,38.837 v1@45.136,44.044 ; v1@45.187,38.608 53.01,38.608 ; C3.1 49.004,52.382 54.452,57.831 C_ldo1.2 ; C3.1@49.073,46.406 53.01,46.406 v1(53.01,40.335) 53.01,38.608 ; Cq.2 57.429,36.678 55.499,38.608 53.01,38.608
  other v1: 45.085,44.018 39.268,66.421 40.259,66.421 41.25,66.421
  other v2: 58.649,56.871 60.287,56.871 61.925,56.871 60.35,58.318 61.925,58.318 63.5,58.318
Net32U4_6: 32U4.6 C5.1 | length 6.6
  Top w0.2: C5.1@48.553,54.534 49.047,54.039 32U4.6
Net32U4_16: 32U4.16 cc1.2 Q1.2 | length 17.2
  Top w0.254: Q1.2 39.599,49.073 38.862,48.336 38.862,44.475 40.018,43.32 32U4.16 43.397,43.188 46.804,43.188 47.066,42.926 47.066,41.427 v1(47.092,41.402)
  Bottom w0.254: cc1.2 47.066,41.377 v1(47.092,41.402)
Net32U4_17: 32U4.17 cc2.2 Q1.1 | length 16.2
  Top w0.254: Q1.1@36.71,46.655 36.71,44.901 39.091,42.52 32U4.17 45.644,42.52 45.949,42.215 45.949,40.208 46.228,39.929 v1(47.117,39.929)
  Bottom w0.254: cc2.2 46.418,39.929 v1(47.117,39.929)
Net32U4_24: 32U4.24 32U4.44 Creset.2 Lm1.1 | length 26.1
  Top w0.2: 32U4.24 45.847,38.126 46.685,38.964 49.454,38.964 50.495,40.005 50.495,43.612 53.343,46.46 54.697,46.46 32U4.44
  Top w0.3: 32U4.44 58.762,46.52 59.846,47.603 59.846,48.666 58.75,48.666 58.344,49.073 58.344,50.804 Creset.2@58.119,51.029
Net32U4_42: 32U4.42 Caref.2 | length 4
  Top w0.2: 32U4.42 56.503,44.92 57.606,43.816 Caref.2
NetA_2: A.2 Qir6.3 | length 5.5
  Top w0.178: v1(60.056,40.244) v1(60.056,40.244) A.2
  Bottom w0.5: Qir6.3 60.016,40.284 v1(60.056,40.244)
NetC_ldo2_1: C_ldo2.1 D1.C Lreg.1 M.6 Qir.2 | length 29.5
  Bottom w0.3: Qir.2 46.599,63.033 47.066,63.5 48.539,63.5 49.276,64.237 49.276,64.567 ; 50.444,63.398 49.276,64.567 ; Lreg.1 51.968,68.25 52.54,67.678 ; M.6 55.387,63.104 ; D1.C 63.729,68.809 63.246,69.291 55.372,69.291 55.016,68.936 C_ldo2.1 51.029,67.488 49.276,65.735 49.276,64.567
NetCir22_2: Cir22.2 Qir2.1 Rir23.1 Rir24.2 | length 3.9
  Top w0.3: Cir22.2 57.595,66.345 Rir24.2 ; Qir2.1 58.783,66.49 Rir23.1
NetCir32_2: Cir32.2 Qir3.1 Rir33.1 Rir34.2 | length 5
  Top w0.5: Qir3.1@37.193,38.42 37.366,38.247 Cir32.2 37.366,35.075 Rir33.1@37.44,35.001 ; Rir33.1 Rir34.2
NetCir42_2: Cir42.2 Qir4.1 Rir43.1 Rir44.2 | length 7.2
  Bottom w0.5: Qir4.1 50.564,34.348 49.873,33.657 Cir42.2 48.618,31.823 Rir43.1 Rir44.2
NetCir52_2: Cir52.2 Qir5.1 Rir53.1 Rir54.2 | length 6.3
  Bottom w0.2: Cir52.2@49.276,19.86 49.407,19.86 Rir54.2
  Bottom w0.3: Qir5.1 47.102,20.081 47.396,19.787 49.203,19.787 Cir52.2@49.276,19.86
NetCir62_2: Cir62.2 Qir6.1 Rir63.1 Rir64.2 | length 8.8
  Bottom w0.3: Qir6.1 60.645,41.234 60.947,40.932 60.947,40.094 61.239,39.802 Rir63.1 63.756,41.452 Rir64.2 ; Rir63.1@61.952,39.648 62.032,39.568 Cir62.2
NetCir72_2: Cir72.2 Qir7.1 Rir73.1 Rir74.2 | length 8
  Bottom w0.2: Rir73.1 62.106,28.294 Rir74.2
  Bottom w0.3: Qir7.1@58.631,26.121 58.697,26.187 Cir72.2@62.179,26.187
  Bottom w0.5: Rir73.1 62.179,28.017 Cir72.2@62.179,26.187
NetD_2: D.2 Qir7.3 | length 5.5
  Top w0.5: v1(59.919,25.222) 59.96,25.181 D.2
  Bottom w0.5: Qir7.3@56.381,25.171 56.431,25.222 v1(59.919,25.222)
NetI2C_2: I2C.2 Qir5.3 Ri2c1.2 Ri2c2.2 | length 13
  Top w0.178: I2C.2@50.059,20.281 50.059,22.098
  Top w0.3: Ri2c2.2 Ri2c1.2 49.2,23.596 v1(50.048,22.748)
  Top w0.5: I2C.2 v1(50.048,22.748) v1(50.048,22.748)
  Bottom w0.3: Qir5.3 49.065,23.731 v1(50.048,22.748)
NetLED1_1: LED1.1 R1.2 | length 2.5
  Top w0.2: LED1.1 40.726,61.331 41.326,60.731 R1.2
NetLED1_2: LED1.2 U1.1 | length 3.6
  Top w0.2: LED1.2 41.667,64.831 v1(42.266,65.43) v1@42.647,65.43
  Bottom w0.2: v1(42.266,65.43) 42.686,65.01 U1.1
NetLED2_2: LED2.2 R7.1 | length 2.5
  Top w0.2: R7.1@37.897,58.293 38.25,58.646 LED2.2@40.259,58.646
NetLED3_2: LED3.2 R6.1 | length 1.6
  Top w0.2: LED3.2@43.79,58.646 R6.1@45.418,58.646
NetLreg_2: Lreg.2 M.1 | length 3.6
  Bottom w0.5: Lreg.2 52.018,64.903 M.1 M.1@55.249,64.765
NetM_4: M.4 RR1.1 RR2.2 | length 6.1
  Bottom w0.2: M.4 58.147,62.503 58.42,62.23 58.42,59.411 58.115,59.106 RR1.1@57.455,59.106 ; 58.42,60.122 58.648,60.35 RR2.2@59.258,60.35
NetQir2_2: Qir2.2 Rir22.1 | length 1.7
  Top w0.3: Qir2.2 59.858,69.428 Rir22.1
NetQir3_2: Qir3.2 Rir32.1 | length 4.3
  Top w0.5: v1(35.687,38.176) 35.763,38.1 35.992,38.1 35.992,38.786 37.193,39.987 Qir3.2@37.193,40.32
  Bottom w0.5: v1(35.687,38.176) 35.966,37.897 Rir32.1
NetQir4_2: Qir4.2 Rir42.1 | length 3.3
  Bottom w0.3: Rir42.1 48.692,36.881 49.083,37.272 Qir4.2
NetQir4_3: Qir4.3 Rm12.1 | length 2.2
  Bottom w0.3: Qir4.3 53.365,36.322 53.899,35.789 53.899,35.077 Rm12.1
NetQir5_2: Qir5.2 Rir52.1 | length 1.8
  Bottom w0.3: Qir5.2 45.202,20.076 Rir52.1
NetQir6_2: Qir6.2 Rir62.1 | length 5.8
  Bottom w0.5: Qir6.2 58.631,37.61 60.046,36.195 Rir62.1
NetQir7_2: Qir7.2 Rir72.1 | length 3.5
  Bottom w0.3: Qir7.2@58.631,24.221 61.946,24.221 Rir72.1
NetR2_1: R2.1 U1.5 | length 2
  Bottom w0.178: R2.1 41.104,62.389 U1.5
NetR4_1: R4.1 U5.D+1 | length 3.3
  Top w0.178: R4.1@59.842,54.762 60.884,54.762 61.62,54.026 U5.D+1
NetR5_1: R5.1 U5.D-1 | length 3.2
  Top w0.178: R5.1@59.842,52.959 61.011,52.959 61.417,53.365 U5.D-1
NetRir24_1: Rir24.1 S1.2 | length 3.4
  Top w0.5: Rir24.1 61.138,65.1 61.773,65.735 S1.2
NetRst1_2: Rst1.2 S2.1 | length 2
  Top w0.5: Rst1.2 28.777,57.048 S2.1
RESET: 32U4.13 Cr1.1 Dr.1 Prog.5 R3.1 S2.3 | length 76.1
  Top w0.2: v1(36.906,51.714) 37.77,51.714 38.419,52.364 42.003,52.364 44.442,49.925 44.442,47.319 45.009,46.752 45.009,45.923 44.805,45.72 32U4.13
  Top w0.254: Prog.5 31.115,16.408 32.309,17.602 35.738,17.602 36.474,18.339 36.474,19.507 Dr.1@38.556,19.507
  Bottom w0.2: v1(34.519,55.905) 35.204,55.905 36.906,54.204 v1(36.906,51.714)
  Bottom w0.254: Prog.5 32.309,17.551 32.309,18.315 32.345,18.352 32.345,30.177 31.625,30.897 30.393,30.897 29.159,32.131 29.159,54 31.064,55.905 v1(34.519,55.905)
TX_LED: 32U4.22 R7.2 | length 21.9
  Top w0.2: v1(37.821,55.804) R7.2@37.821,56.643 ; v1(41.148,38.456) 41.212,38.52 32U4.22
  Bottom w0.2: v1(37.821,55.804) 37.821,46.965 37.821,46.076 41.173,42.723 41.173,38.481 v1(41.148,38.456)
UEXT_POWER: Qir3.3 UEXT.1 | length 3.6
  Top w0.5: UEXT.1 33.655,39.776 34.061,39.37 Qir3.3@34.943,39.37
V_BATT: C8.2 C_BAT.+ Cir42.1 JP1.2 Qir.3 Rir42.2 Rir43.2 U1.3 | length 51
  Bottom w0.3: 44.145,67.92 44.145,67.615 45.009,66.751 U1.3 46.267,65.01 46.652,64.625 Qir.3
  Bottom w0.5: JP1.2 36.398,60.046 38.887,57.556 38.887,45.847 42.215,42.52 42.215,33.68 44.145,31.75 Rir43.2 Rir42.2
  other v2: 36.398,60.757 36.398,62.332 36.398,63.906
pads on no net: A.SS1 A.SS2 D.SS1 D.SS2 I2C.SS1 I2C.SS2 JP1.NC1 JP1.NC2 S2.2 S2.4 U5.1 U5.ID1
copper on no net: | length 402.6
  Top w0.025: 43.637,28.689 43.637,28.791 ; 43.637,29.299 43.637,30.29 ; 43.663,28.613 43.663,28.842 ; 43.663,29.299 43.663,30.29 ; 43.688,28.562 43.688,28.918 ; 43.688,29.299 43.688,30.29 ; 43.713,28.511 43.713,28.943 ; 43.713,29.299 43.713,30.29 ; 43.739,28.461 43.739,29.019 ; 43.739,29.299 43.739,30.29 ; 43.764,28.41 43.764,29.045 ; 43.764,29.299 43.764,30.29 ; 43.79,28.334 43.79,29.121 ; 43.79,29.299 43.79,30.29 ; 43.815,28.308 43.815,29.172 ; 43.815,29.299 43.815,29.502 ; 43.815,30.112 43.815,30.29 ; 43.84,28.258 43.84,28.689 ; 43.84,28.765 43.84,29.223 ; 43.84,29.299 43.84,29.502 ; 43.84,30.112 43.84,30.29 ; 43.866,28.207 43.866,28.639 ; 43.866,28.816 43.866,29.273 ; 43.866,29.299 43.866,29.502 ; 43.866,30.112 43.866,30.29 ; 43.891,28.13 43.891,28.588 ; 43.891,28.892 43.891,29.502 ; 43.891,30.112 43.891,30.29 ; 43.917,28.08 43.917,28.537 ; 43.917,28.918 43.917,29.502 ; 43.917,30.112 43.917,30.29 ; 43.942,28.029 43.942,28.486 ; 43.942,28.969 43.942,29.502 ; 43.942,30.112 43.942,30.29 ; 43.967,27.978 43.967,28.435 ; 43.967,29.019 43.967,29.502 ; 43.967,30.112 43.967,30.29 ; 43.993,27.927 43.993,28.384 ; 43.993,29.07 43.993,29.502 ; 43.993,30.112 43.993,30.29 ; 44.018,27.877 44.018,28.334 ; 44.018,29.121 44.018,29.502 ; 44.018,30.112 44.018,30.29 ; 44.044,27.826 44.044,28.283 ; 44.044,29.172 44.044,29.502 ; 44.044,30.112 44.044,30.29 ; 44.069,27.775 44.069,28.232 ; 44.069,29.223 44.069,29.502 ; 44.069,30.112 44.069,30.29 ; 44.094,27.724 44.094,28.181 ; 44.094,29.273 44.094,29.502 ; 44.094,30.112 44.094,30.29 ; 44.12,27.673 44.12,28.105 ; 44.12,29.35 44.12,29.502 ; 44.12,30.112 44.12,30.29 ; 44.145,27.038 44.145,28.08 ; 44.145,29.375 44.145,29.502 ; 44.145,30.112 44.145,30.416 ; 44.171,26.987 44.171,28.029 ; 44.171,29.451 44.171,29.502 ; 44.171,30.112 44.171,30.467 ; 44.196,26.937 44.196,27.978 ; 44.196,30.112 44.196,30.518 ; 44.221,26.911 44.221,27.902 ; 44.221,30.112 44.221,30.543 ; 44.247,26.886 44.247,27.877 ; 44.247,30.112 44.247,30.569 ; 44.272,26.86 44.272,27.826 ; 44.272,30.112 44.272,30.594 ; 44.298,26.835 44.298,27.775 ; 44.298,30.112 44.298,30.62 ; 44.323,26.835 44.323,27.699 ; 44.323,30.112 44.323,30.62 ; 44.348,26.81 44.348,27.648 ; 44.348,30.112 44.348,30.645 ; 44.374,26.81 44.374,27.622 ; 44.374,30.112 44.374,30.645 ; 44.399,26.81 44.399,27.546 ; 44.399,30.112 44.399,30.67 ; 44.425,26.784 44.425,27.521 ; 44.425,30.112 44.425,30.67 ; 44.45,26.784 44.45,27.47 ; 44.45,30.112 44.45,30.67 ; 44.475,26.784 44.475,27.419 ; 44.475,30.112 44.475,30.67 ; 44.501,26.784 44.501,27.368 ; 44.501,30.112 44.501,30.67 ; 44.526,26.784 44.526,27.292 ; 44.526,30.162 44.526,30.67 ; 44.552,26.784 44.552,27.267 ; 44.552,30.213 44.552,30.67 ; 44.577,26.784 44.577,27.191 ; 44.577,30.264 44.577,30.67 ; 44.602,26.784 44.602,27.165 ; 44.602,30.315 44.602,30.67 ; 44.628,26.784 44.628,27.089 ; 44.628,30.366 44.628,30.67 ; 44.653,26.784 44.653,27.064 ; 44.653,30.416 44.653,30.67 ; 44.679,26.784 44.679,27.038 ; 44.679,30.442 44.679,30.67 ; 44.704,26.784 44.704,27.013 ; 44.704,30.442 44.704,30.67 ; 44.729,26.784 44.729,27.013 ; 44.729,30.442 44.729,30.67 ; 44.755,26.784 44.755,27.013 ; 44.755,30.442 44.755,30.67 ; 44.78,26.784 44.78,27.038 ; 44.78,30.442 44.78,30.67 ; 44.806,26.784 44.806,27.064 ; 44.806,30.416 44.806,30.67 ; 44.831,26.784 44.831,27.114 ; 44.831,30.34 44.831,30.67 ; 44.856,26.784 44.856,27.165 ; 44.856,30.315 44.856,30.67 ; 44.882,26.784 44.882,27.216 ; 44.882,30.239 44.882,30.67 ; 44.907,26.429 44.907,26.683 ; 44.907,26.784 44.907,27.267 ; 44.907,30.213 44.907,30.67 ; 44.907,30.772 44.907,31.026 ; 44.933,26.429 44.933,26.683 ; 44.933,26.784 44.933,27.318 ; 44.933,30.137 44.933,30.67 ; 44.933,30.772 44.933,31.051 ; 44.958,26.403 44.958,26.683 ; 44.958,26.784 44.958,27.368 ; 44.958,30.086 44.958,30.67 ; 44.958,30.772 44.958,31.051 ; 44.983,26.403 44.983,26.683 ; 44.983,26.784 44.983,27.419 ; 44.983,30.035 44.983,30.67 ; 44.983,30.772 44.983,31.051 ; 45.009,26.403 45.009,26.683 ; 45.009,26.784 45.009,27.47 ; 45.009,29.985 45.009,30.67 ; 45.009,30.772 45.009,31.077 ; 45.034,26.403 45.034,26.683 ; 45.034,26.784 45.034,27.521 ; 45.034,29.934 45.034,30.67 ; 45.034,30.772 45.034,31.077 ; 45.06,26.403 45.06,26.683 ; 45.06,26.784 45.06,27.572 ; 45.06,29.883 45.06,30.67 ; 45.06,30.772 45.06,31.077 ; 45.085,26.403 45.085,26.683 ; 45.085,26.784 45.085,27.622 ; 45.085,29.832 45.085,30.67 ; 45.085,30.772 45.085,31.077 ; 45.11,26.403 45.11,26.683 ; 45.11,26.784 45.11,27.673 ; 45.11,29.781 45.11,30.67 ; 45.11,30.772 45.11,31.077 ; 45.136,26.403 45.136,26.683 ; 45.136,26.784 45.136,27.724 ; 45.136,29.756 45.136,30.67 ; 45.136,30.772 45.136,31.051 ; 45.161,26.403 45.161,26.683 ; 45.161,26.784 45.161,27.775 ; 45.161,29.68 45.161,30.67 ; 45.161,30.772 45.161,31.051 ; 45.187,26.403 45.187,26.683 ; 45.187,26.784 45.187,27.826 ; 45.187,29.629 45.187,30.67 ; 45.187,30.772 45.187,31.051 ; 45.212,26.429 45.212,26.683 ; 45.212,26.784 45.212,27.877 ; 45.212,29.578 45.212,30.67 ; 45.212,30.772 45.212,31.026 ; 45.237,26.784 45.237,27.927 ; 45.237,29.527 45.237,30.67 ; 45.263,26.784 45.263,27.978 ; 45.263,29.477 45.263,30.67 ; 45.288,26.784 45.288,28.029 ; 45.288,29.426 45.288,30.67 ; 45.314,26.784 45.314,28.08 ; 45.314,29.375 45.314,30.67 ; 45.339,26.784 45.339,28.13 ; 45.339,29.324 45.339,30.67 ; 45.364,26.784 45.364,28.181 ; 45.364,29.273 45.364,30.67 ; 45.39,26.784 45.39,28.232 ; 45.39,29.223 45.39,30.67 ; 45.415,26.784 45.415,28.283 ; 45.415,29.172 45.415,30.67 ; 45.441,26.454 45.441,26.683 ; 45.441,26.784 45.441,28.334 ; 45.441,29.121 45.441,30.67 ; 45.441,30.772 45.441,31.001 ; 45.466,26.429 45.466,26.683 ; 45.466,26.784 45.466,28.384 ; 45.466,29.07 45.466,30.67 ; 45.466,30.772 45.466,31.051 ; 45.491,26.403 45.491,26.683 ; 45.491,26.784 45.491,28.435 ; 45.491,29.019 45.491,30.67 ; 45.491,30.772 45.491,31.051 ; 45.517,26.403 45.517,26.683 ; 45.517,26.784 45.517,28.486 ; 45.517,28.969 45.517,30.67 ; 45.517,30.772 45.517,31.051 ; 45.542,26.403 45.542,26.683 ; 45.542,26.784 45.542,28.537 ; 45.542,28.918 45.542,30.67 ; 45.542,30.772 45.542,31.051 ; 45.568,26.403 45.568,26.683 ; 45.568,26.784 45.568,28.588 ; 45.568,28.867 45.568,30.67 ; 45.568,30.772 45.568,31.077 ; 45.593,26.403 45.593,26.683 ; 45.593,26.784 45.593,28.664 ; 45.593,28.816 45.593,30.67 ; 45.593,30.772 45.593,31.077 ; 45.618,26.403 45.618,26.683 ; 45.618,26.784 45.618,28.689 ; 45.618,28.765 45.618,30.67 ; 45.618,30.772 45.618,31.077 ; 45.644,26.403 45.644,26.683 ; 45.644,26.784 45.644,30.67 ; 45.644,30.772 45.644,31.077 ; 45.669,26.403 45.669,26.683 ; 45.669,26.784 45.669,30.67 ; 45.669,30.772 45.669,31.051 ; 45.695,26.403 45.695,26.683 ; 45.695,26.784 45.695,30.67 ; 45.695,30.772 45.695,31.051 ; 45.72,26.403 45.72,26.683 ; 45.72,26.784 45.72,30.67 ; 45.72,30.772 45.72,31.051 ; 45.745,26.429 45.745,26.683 ; 45.745,26.784 45.745,30.67 ; 45.745,30.772 45.745,31.051 ; 45.771,26.454 45.771,26.683 ; 45.771,26.784 45.771,30.67 ; 45.771,30.772 45.771,31.001 ; 45.796,26.784 45.796,30.67 ; 45.822,26.784 45.822,30.67 ; 45.847,26.784 45.847,30.67 ; 45.872,26.784 45.872,30.67 ; 45.898,26.784 45.898,30.67 ; 45.923,26.784 45.923,30.67 ; 45.949,26.784 45.949,30.67 ; 45.974,26.784 45.974,30.67 ; 45.999,26.429 45.999,26.683 ; 45.999,26.784 45.999,30.67 ; 45.999,30.772 45.999,31.026 ; 46.025,26.403 46.025,26.683 ; 46.025,26.784 46.025,30.67 ; 46.025,30.772 46.025,31.051 ; 46.05,26.403 46.05,26.683 ; 46.05,26.784 46.05,30.67 ; 46.05,30.772 46.05,31.051 ; 46.076,26.403 46.076,26.683 ; 46.076,26.784 46.076,30.67 ; 46.076,30.772 46.076,31.051 ; 46.101,26.403 46.101,26.683 ; 46.101,26.784 46.101,30.67 ; 46.101,30.772 46.101,31.077 ; 46.126,26.403 46.126,26.683 ; 46.126,26.784 46.126,30.67 ; 46.126,30.772 46.126,31.077 ; 46.152,26.403 46.152,26.683 ; 46.152,26.784 46.152,30.67 ; 46.152,30.772 46.152,31.077 ; 46.177,26.403 46.177,26.683 ; 46.177,26.784 46.177,30.67 ; 46.177,30.772 46.177,31.077 ; 46.203,26.403 46.203,26.683 ; 46.203,26.784 46.203,30.67 ; 46.203,30.772 46.203,31.077 ; 46.228,26.403 46.228,26.683 ; 46.228,26.784 46.228,30.67 ; 46.228,30.772 46.228,31.051 ; 46.253,26.403 46.253,26.683 ; 46.253,26.784 46.253,30.67 ; 46.253,30.772 46.253,31.051 ; 46.279,26.429 46.279,26.683 ; 46.279,26.784 46.279,30.67 ; 46.279,30.772 46.279,31.051 ; 46.304,26.429 46.304,26.683 ; 46.304,26.784 46.304,30.67 ; 46.304,30.772 46.304,31.026 ; 46.33,26.784 46.33,30.67 ; 46.355,26.784 46.355,30.67 ; 46.38,26.784 46.38,30.67 ; 46.406,26.784 46.406,30.67 ; 46.431,26.784 46.431,30.67 ; 46.457,26.784 46.457,30.67 ; 46.482,26.784 46.482,30.67 ; 46.507,26.784 46.507,30.67 ; 46.533,26.429 46.533,26.683 ; 46.533,26.784 46.533,30.67 ; 46.533,30.772 46.533,31.026 ; 46.558,26.429 46.558,26.683 ; 46.558,26.784 46.558,30.67 ; 46.558,30.772 46.558,31.051 ; 46.584,26.403 46.584,26.683 ; 46.584,26.784 46.584,30.67 ; 46.584,30.772 46.584,31.051 ; 46.609,26.403 46.609,26.683 ; 46.609,26.784 46.609,30.67 ; 46.609,30.772 46.609,31.051 ; 46.634,26.403 46.634,26.683 ; 46.634,26.784 46.634,30.67 ; 46.634,30.772 46.634,31.077 ; 46.66,26.403 46.66,26.683 ; 46.66,26.784 46.66,30.67 ; 46.66,30.772 46.66,31.077 ; 46.685,26.403 46.685,26.683 ; 46.685,26.784 46.685,30.67 ; 46.685,30.772 46.685,31.077 ; 46.711,26.403 46.711,26.683 ; 46.711,26.784 46.711,30.67 ; 46.711,30.772 46.711,31.077 ; 46.736,26.403 46.736,26.683 ; 46.736,26.784 46.736,30.67 ; 46.736,30.772 46.736,31.077 ; 46.761,26.403 46.761,26.683 ; 46.761,26.784 46.761,30.67 ; 46.761,30.772 46.761,31.051 ; 46.787,26.403 46.787,26.683 ; 46.787,26.784 46.787,30.67 ; 46.787,30.772 46.787,31.051 ; 46.812,26.403 46.812,26.683 ; 46.812,26.784 46.812,30.67 ; 46.812,30.772 46.812,31.051 ; 46.838,26.429 46.838,26.683 ; 46.838,26.784 46.838,30.67 ; 46.838,30.772 46.838,31.026 ; 46.863,26.784 46.863,30.67 ; 46.888,26.784 46.888,30.67 ; 46.914,26.81 46.914,30.67 ; 46.939,26.81 46.939,30.645 ; 46.965,26.81 46.965,30.645 ; 46.99,26.835 46.99,30.62 ; 47.015,26.835 47.015,30.62 ; 47.041,26.86 47.041,30.594 ; 47.066,26.886 47.066,30.569 ; 47.092,26.911 47.092,30.543 ; 47.117,26.937 47.117,30.518 ; 47.142,26.987 47.142,30.493 ; 47.168,27.038 47.168,30.416 ; 47.295,27.749 47.295,28.105 ; 47.295,28.283 47.295,28.639 ; 47.295,28.842 47.295,29.172 ; 47.295,29.375 47.295,29.705 ; 47.32,27.749 47.32,28.105 ; 47.32,28.283 47.32,28.639 ; 47.32,28.842 47.32,29.172 ; 47.32,29.375 47.32,29.705 ; 47.346,27.749 47.346,28.105 ; 47.346,28.283 47.346,28.639 ; 47.346,28.842 47.346,29.172 ; 47.346,29.375 47.346,29.705 ; 47.371,27.749 47.371,28.105 ; 47.371,28.283 47.371,28.639 ; 47.371,28.842 47.371,29.172 ; 47.371,29.375 47.371,29.705 ; 47.396,27.749 47.396,28.105 ; 47.396,28.283 47.396,28.639 ; 47.396,28.842 47.396,29.172 ; 47.396,29.375 47.396,29.705 ; 47.422,27.749 47.422,28.105 ; 47.422,28.283 47.422,28.639 ; 47.422,28.842 47.422,29.172 ; 47.422,29.375 47.422,29.705 ; 47.447,27.749 47.447,28.105 ; 47.447,28.283 47.447,28.639 ; 47.447,28.842 47.447,29.172 ; 47.447,29.375 47.447,29.705 ; 47.473,27.749 47.473,28.105 ; 47.473,28.283 47.473,28.639 ; 47.473,28.842 47.473,29.172 ; 47.473,29.375 47.473,29.705 ; 47.498,27.749 47.498,28.105 ; 47.498,28.283 47.498,28.639 ; 47.498,28.842 47.498,29.172 ; 47.498,29.375 47.498,29.705 ; 47.523,27.749 47.523,28.08 ; 47.523,28.308 47.523,28.613 ; 47.523,28.842 47.523,29.146 ; 47.523,29.375 47.523,29.705 ; 47.549,27.8 47.549,28.054 ; 47.549,28.334 47.549,28.588 ; 47.549,28.867 47.549,29.121 ; 47.549,29.426 47.549,29.68

## Polygon pours and split planes (outlines as drawn)
3.3V on Bottom "3.3V" (hatched 90Degree grid 1 track 1, remove dead copper, pour order 2): 56.007,54.28 56.007,49.53 56.007,45.085 61.9,45.085 68.072,45.085 68.072,44.806 68.072,54.28 64.973,54.28 61.9,54.28
3.3V on Bottom "3.3V" (hatched 90Degree grid 1 track 1, remove dead copper, pour order 12): 36.398,60.046 57.785,60.046 57.81,60.071 57.81,46.787 36.398,46.787

## Keep-outs
Keep-Out Layer:
  the board outline again, w0.254

## Other copper
Top:
  rectangle net 5V: 66.421,60.35 66.878,60.63
  rectangle net 5V: 66.7,59.614 67.361,60.63
  rectangle net 5V: 56.007,59.893 61.265,62.636
  rectangle net V_BATT: 29.921,59.944 35.738,61.011
  rectangle net V_BATT: 27.686,59.944 29.921,64.059
  rectangle net V_BATT: 35.408,59.944 38.557,64.059
  rectangle net V_BATT: 33.376,64.059 38.557,65.888
  rectangle net V_BATT: 27.686,64.059 33.68,70.764
  rectangle net 5V: 61.697,48.438 64.465,52.908
  rectangle net 5V: 58.649,59.893 59.182,61.519
  rectangle net 5V: 66.7,48.158 67.361,59.995
  rectangle net 5V: 59.03,59.893 66.675,60.63
  rectangle net 5V: 43.409,63.703 55.245,65.862
  rectangle net GND: 34.773,66.472 55.245,70.739
  rectangle net 5V: 43.409,61.519 58.09,63.881
  rectangle net GND: 63.348,55.118 64.491,55.245
  rectangle net GND: 62.738,56.464 64.059,58.953
  rectangle: 63.932,55.245 64.491,58.903
  rectangle net GND: 62.128,55.143 62.738,56.794
  rectangle net GND: 57.404,56.236 62.738,58.953
  rectangle net 5V: 61.697,47.625 67.386,48.946
  text "Battery Operated Board" at 48.666,24.587 h0.7 r90
  text "2015" at 47.676,24.511 h1 r90
Bottom:
  rectangle net V_BATT: 44.755,64.414 48.666,68.224
  rectangle net V_BATT: 44.907,66.091 46.609,68.021
  rectangle net GND: 61.316,57.683 63.906,58.903
  rectangle net GND: 57.633,56.261 62.611,57.81
  rectangle net V_BATT: 35.89,67.589 46.076,69.088
  rectangle net 3.3V: 54.381,59.868 57.887,61.493
  rectangle net V_BATT: 35.89,67.234 48.387,68.123
  rectangle net GND: 37.795,63.525 41.529,66.599
  rectangle net NetC_ldo2_1: 50.19,66.573 55.855,69.469
  rectangle net GND: 56.998,65.913 61.087,68.834
  rectangle net GND: 58.826,61.29 60.884,66.091
  rectangle net GND: 33.884,70.002 65.557,70.587
  rectangle net GND: 27.686,64.119 34.9,70.587
  rectangle net GND: 65.43,62.992 67.97,70.587
  rectangle net GND: 60.325,57.683 61.316,68.834
  rectangle net GND: 58.776,57.709 60.554,59.411
  rectangle net GND: 54.407,57.302 61.316,58.369
  rectangle net NetC_ldo2_1: 49.2,61.798 55.702,63.602

## Silkscreen, mask and mechanical layers (free items; w line width, h text height)
Top Overlay:
  text "RX" at 44.145,56.236 h0.86 r90
  text "TX" at 40.742,56.185 h0.86 r90
Dimension:
  lines w0.254: 25.197,69.545 25.705,71.069 ; 25.222,16.84 25.73,15.316 ; 25.451,71.069 25.959,71.069 ; 25.476,15.316 25.984,15.316 ; 25.714,51.217 25.705,71.069 ; 25.721,35.169 25.73,15.316 ; 26.213,69.545 25.705,71.069 ; 26.238,16.84 25.73,15.316 ; 27.178,11.836 27.178,12.344 ; 28.701,12.601 27.178,12.09 ; 28.703,11.585 27.178,12.09 ; 40.001,12.11 27.178,12.09 ; 55.541,12.135 68.365,12.155 ; 66.84,12.66 68.365,12.155 ; 66.841,11.644 68.365,12.155 ; 68.364,12.409 68.365,11.901
  text "55.753 (mm)" at 24.8,50.962 h1.52 r270.03
  text "41.187 (mm)" at 40.257,11.197 h1.52 r0.09
tDocu:
  text "Mike Hord" at -32.15,50.4 h1.51
  text "Revised by: Kade Jensen" at -52.47,47.86 h1.51

## Text inside footprints (layer, text, board x,y; h text height)
A: tNames ">NAME" at 67.437,40.878 h0.69 r270; tValues ">VALUE" at 65.024,41.148 h0.69 r270; tFinish ">name" at 65.075,41.095 h0.69 r270
C_BAT: tNames ">NAME" at 35.634,66.167 h1.57 r180; tValues ">VALUE" at 35.634,69.158 h1.57 r180
C_usb: tNames ">NAME" at 54.051,67.587 h1.57 r270; tValues ">VALUE" at 51.06,67.587 h1.57 r270
D: tNames ">NAME" at 67.437,25.816 h0.69 r270; tValues ">VALUE" at 65.024,26.086 h0.69 r270; tFinish ">name" at 65.075,26.033 h0.69 r270
I2C: tNames ">NAME" at 50.682,14.681 h0.69 r180; tValues ">VALUE" at 50.952,17.094 h0.69 r180; tFinish ">name" at 50.899,17.043 h0.69 r180
JP1: tDocu "+" at 37.541,67.513 h1.97 r180; tDocu "-" at 32.461,67.513 h1.97 r180
NRF2: Top Overlay "8" at 33.147,25.603 h1.27 r270; Top Overlay "7" at 30.607,25.603 h1.27 r270; Top Overlay "1" at 30.607,36.779 h1.27 r270; Top Overlay "2" at 33.147,37.287 h1.27 r270
Prog: Top Overlay "6" at 33.147,14.834 h1.27 r270; Top Overlay "5" at 30.607,14.834 h1.27 r270; Top Overlay "2" at 33.147,23.978 h1.27 r270; Top Overlay "1" at 30.607,23.47 h1.27 r270
Q1: tNames ">NAME" at 35.916,50.038 h1.97; tValues ">VALUE" at 42.139,45.466 h1.97 r180
S1: tNames ">Name" at 66.726,67.005 h0.94 r270
UEXT: Top Overlay "10" at 31.623,53.569 h1.27 r90; Top Overlay "9" at 34.163,53.569 h1.27 r90; Top Overlay "1" at 34.163,39.853 h1.27 r90; Top Overlay "2" at 31.623,39.345 h1.27 r90